# Altium PCB BD4Gv1.PcbDoc
Units mil, origin at the board's own origin, x right, y up, seen from the top; angles counter-clockwise.
Board outline 3562.99 x 3937.01 mil, 2 copper layers (Top Layer, Bottom Layer); 94 components, 79 nets, 401 pads, 136 vias.
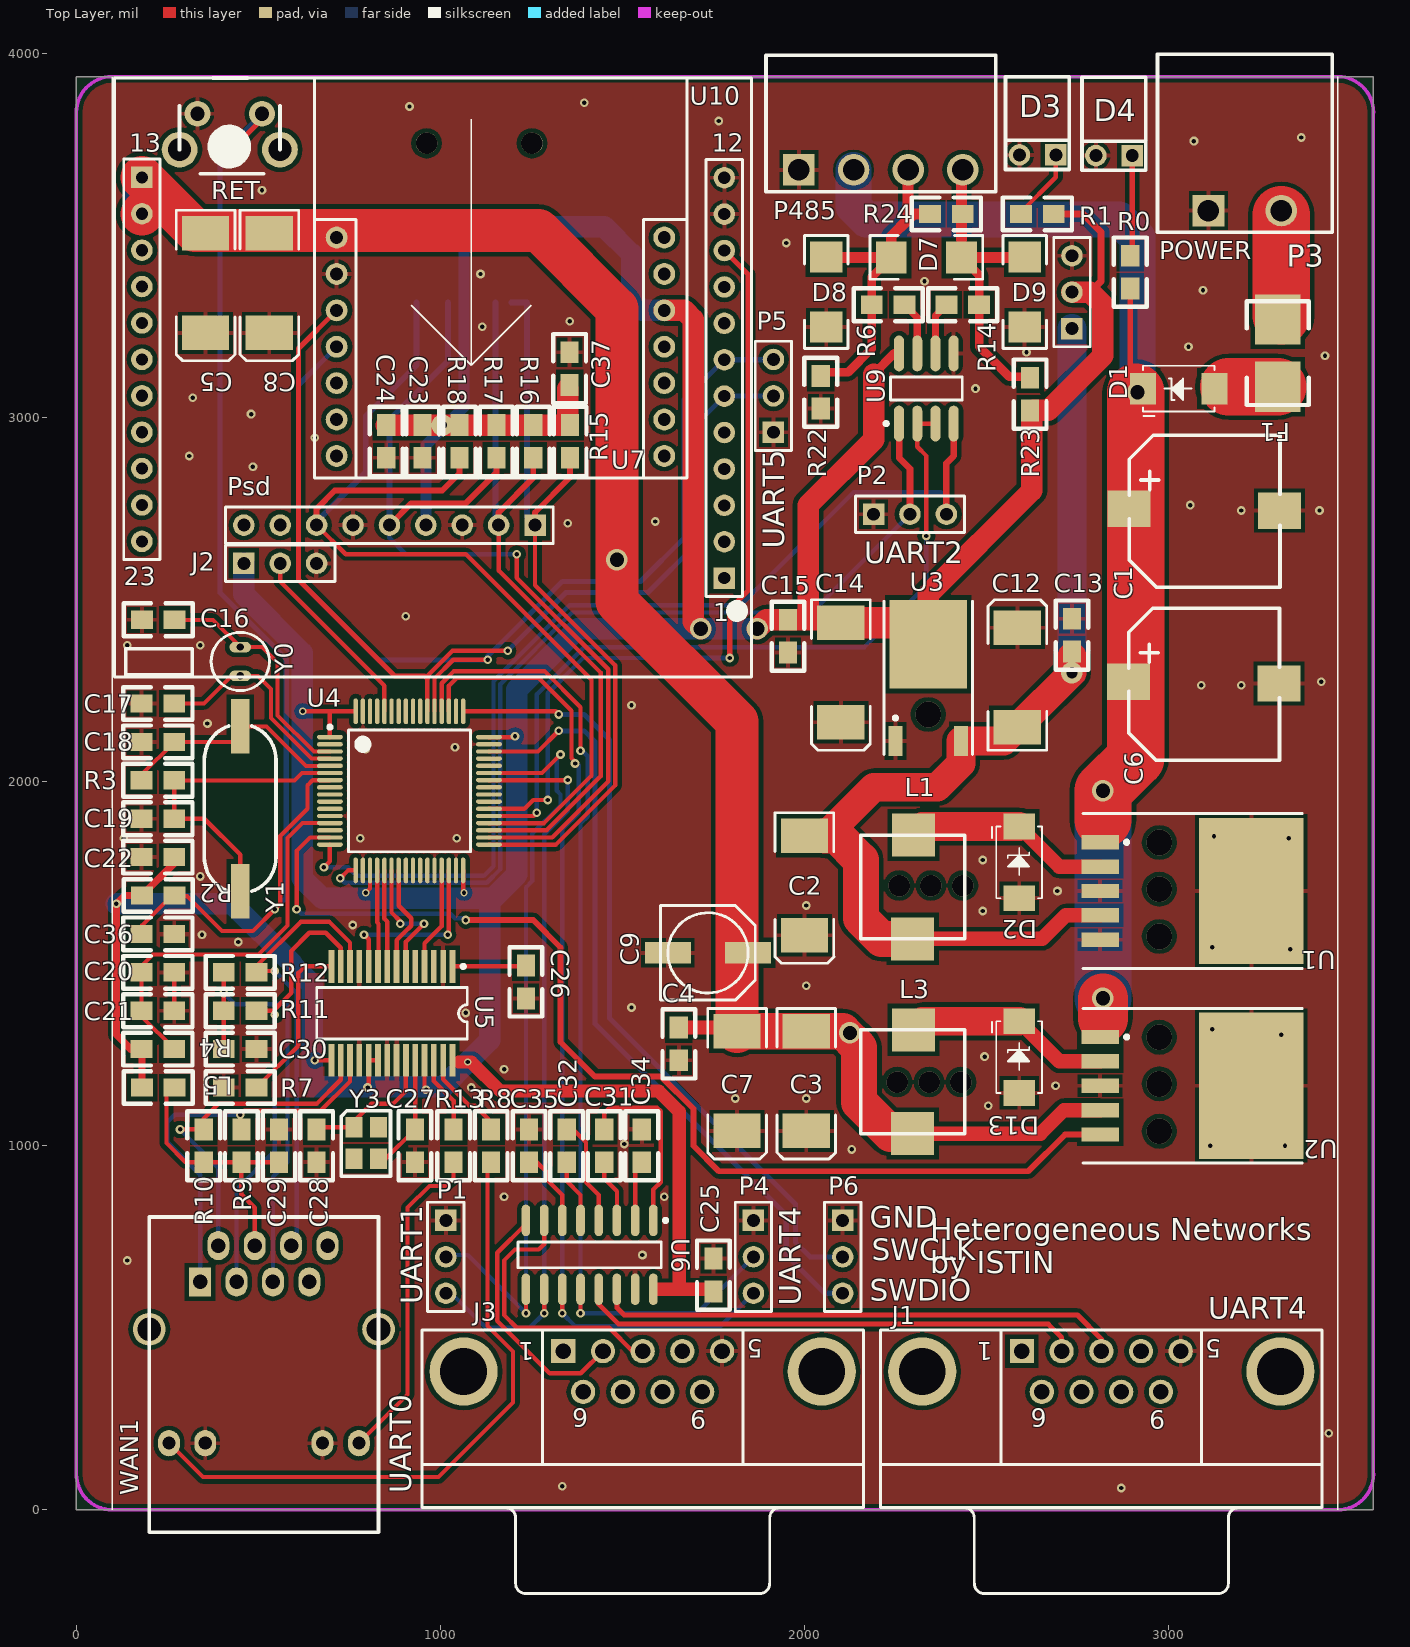
[diagram p0: Top Layer view]
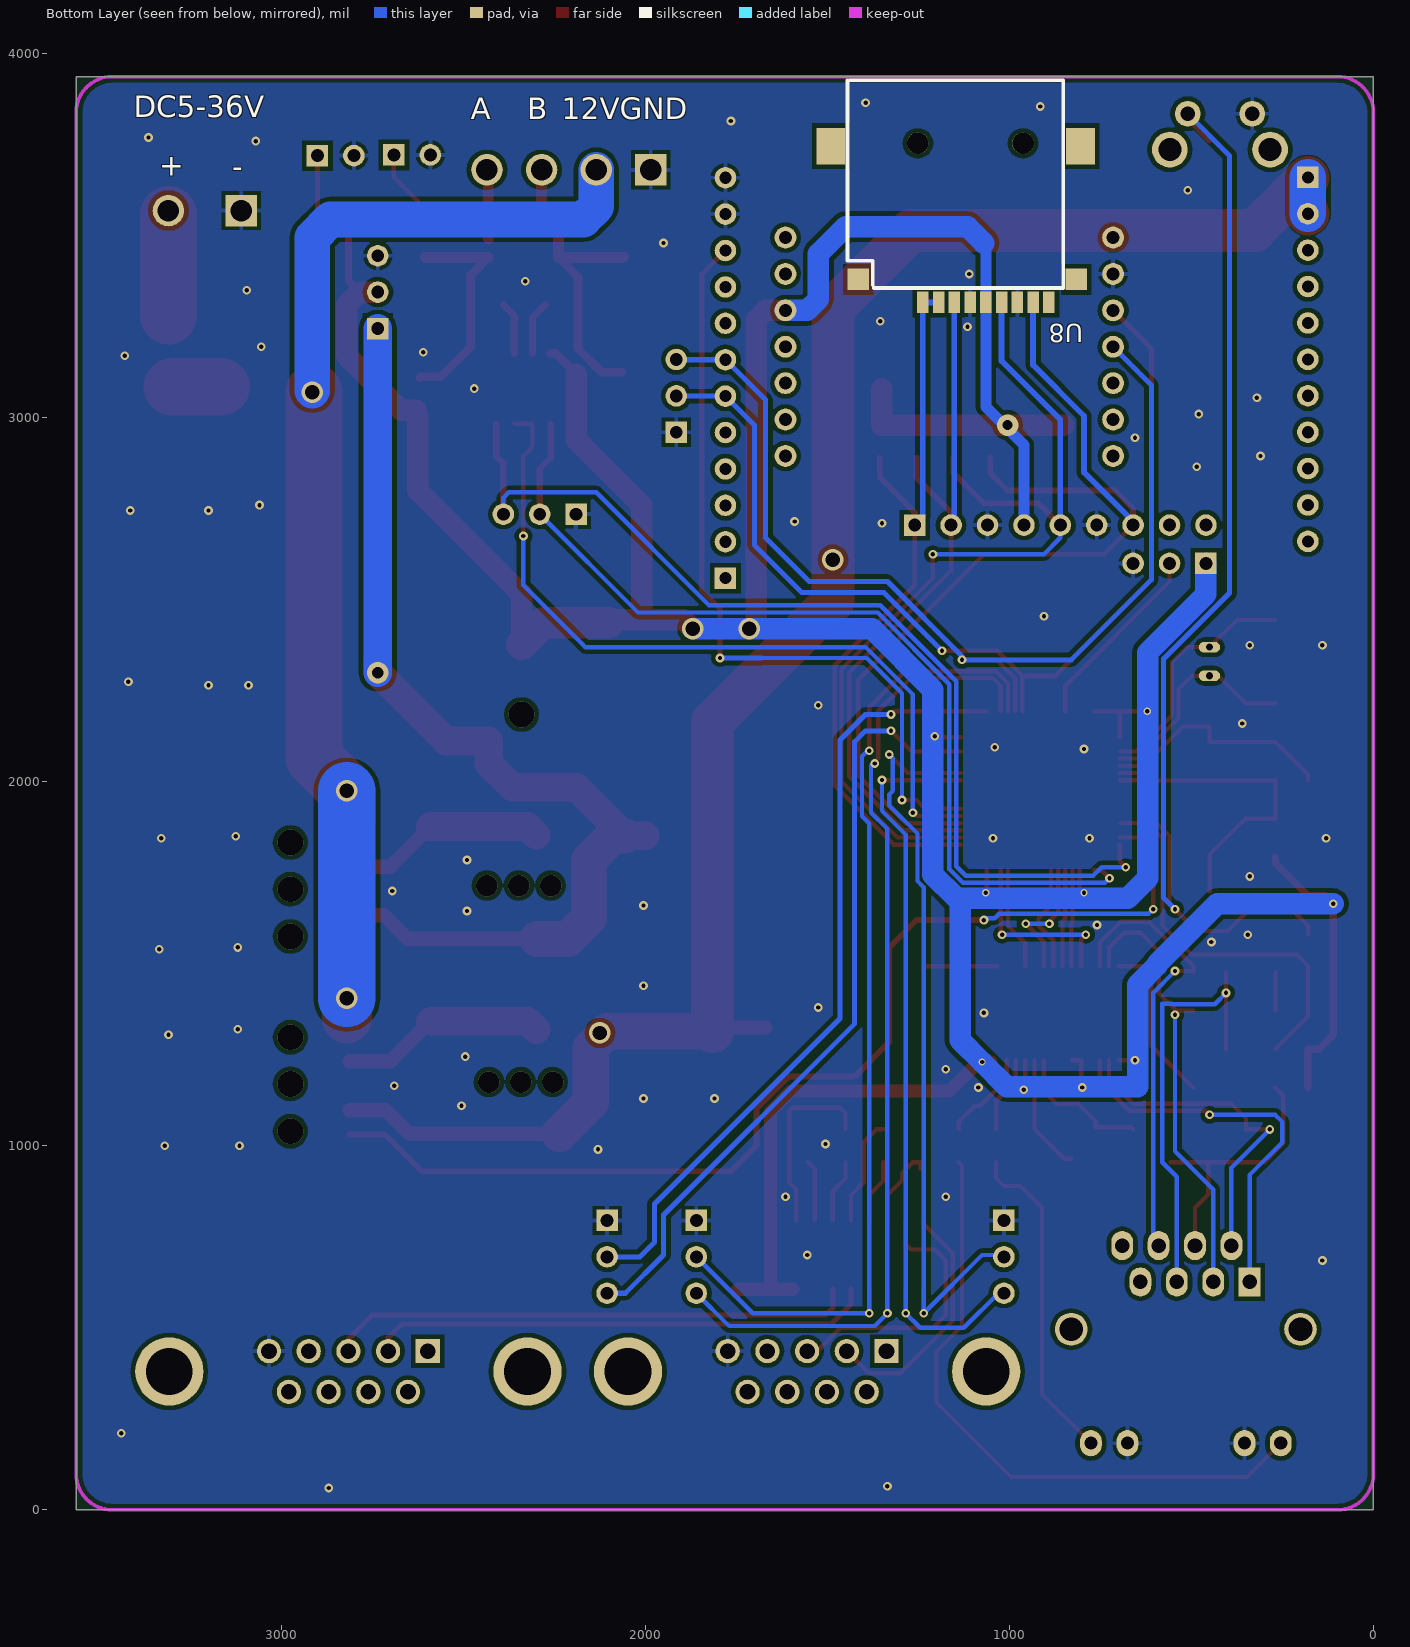
[diagram p1: Bottom Layer view, seen from below]

## Layer stack, top to bottom
Top Solder: solder mask 0.4, Solder Resist, Dk 3.5
Top Layer: signal copper 1.4
Dielectric1: dielectric 12.6, FR-4, Dk 4.8
Bottom Layer: signal copper 1.4
Bottom Solder: solder mask 0.4, Solder Resist, Dk 3.5

## Board outline
0,0 3562.99,0 3562.99,3937.01 0,3937.01

## Design rules (kind name [scope] priority, off if disabled: settings)
Clearance Clearance_1 [IsRegion] p1: gap=12
Clearance [All] p2: gap=7
ComponentClearance ComponentClearance_4 [InComponent('Y1')] p1: gap=0 collisioncheckmode=3 verticalgap=0 showdistances=FALSE
ComponentClearance ComponentClearance_3 [InComponent('C6')] p2: gap=0 collisioncheckmode=3 verticalgap=0 showdistances=FALSE
ComponentClearance ComponentClearance_2 [InComponent('Y0')] p3: gap=0 collisioncheckmode=3 verticalgap=0 showdistances=FALSE
ComponentClearance ComponentClearance_1 [InComponent('U7')] p4: gap=0 collisioncheckmode=3 verticalgap=0 showdistances=FALSE
ComponentClearance [All] p5: gap=0 collisioncheckmode=3 verticalgap=0 showdistances=FALSE
PolygonConnect via [IsVia] p1: connectstyle=Direct reliefconductorwidth=10 reliefentries=4 polygonreliefangle="90 Angle" airgapwidth=10
PolygonConnect PolygonConnect_1 [All] p2: connectstyle=Relief reliefconductorwidth=12 reliefentries=4 polygonreliefangle="90 Angle" airgapwidth=10
RoutingVias [All] p1: holewidth=12 width=24 viastyle="Through Hole" minholewidth=12 minwidth=24 maxholewidth=28 maxwidth=50
SolderMaskExpansion [All] p1: expansion=4
Width [All] p1: maxlimit=196.85 minlimit=10 preferedwidth=12 minimp=50.000000 maximp=50.000000 favimp=50.000000
29 further rules are at their usual default settings.

## Components (designator, comment, footprint, x,y, rotation, side; value= is the part's Value field where it differs from the comment)
C1 "470u/35V" C1007 2891.61,2755 r0 top
C2 "470u/10V" SMC 2000,1715 r270 top
C3 "470u/10V" SMC 2005,1177.79 r270 top
C4 "0.01uf" 0805 1655,1325 r270 top
C5 "470u/10V" SMC 355,3370 r270 top
C6 "470u/35V" C1007 2890,2280 r0 top
C7 "470u/10V" SMC 1815,1177.79 r270 top
C8 "470u/10V" SMC 530,3370 r270 top
C9 "470u/10V" CC6.56.5 1735,1530 r180 top
C12 "10uf" SMC 2585,2286.4 r90 top
C13 "0.01uf" 0805 2735,2357.92 r90 top
C14 "10uf" SMC 2100,2300.18 r270 top
C15 "0.01uf" 0805 1955,2445 r270 top
C16 "22pF" 0805 180,2445 r0 top
C17 "22pF" 0805 179.02,2215 r0 top
C18 "22pF" 0805 179.02,2109.5 r0 top
C19 "22pF" 0805 179.02,1898.5 r0 top
C20 "10uF" 0805 179.02,1476.5 r0 top
C21 "0.1uF" 0805 269.02,1371 r180 top
C22 "0.1uF" 0805 179.02,1793 r0 top
C23 "0.1uF" 0805 951.22,2890 r90 top
C24 "0.1uF" 0805 851.22,2980 r270 top
C25 "0.1uF" 0805 1750,600 r90 top
C26 "10uF" 0805 1235,1405 r90 top
C27 "18pF" 0805 930,1045 r270 top
C28 "18pF" 0805 660,1045 r270 top
C29 "10pF" 0805 556.67,1045 r270 top
C30 "10pF" 0805 495,1265.5 r180 top
C31 "0.1uF" 0805 1450,955 r90 top
C32 "0.1uF" 0805 1346.88,1045 r270 top
C34 "0.1uF" 0805 1553.12,955 r90 top
C35 "0.1uF" 0805 1243.75,955 r90 top
C36 "0.1uF" 0805 179.02,1582 r0 top
C37 "0.1uF" 0805 1355,3090 r90 top
D1 "B360A" B360A 3126.85,3080 r180 top
D2 "B360A" B360A 2590,1680.25 r90 top
D3 "LED" LED_SIDE 2640,3937.01 r270 top
D4 "LED" LED_SIDE 2850,3935 r270 top
D7 "P6SMBJ6.8CA" DO-2144AA 2335,3440.31 r180 top
D8 "P6SMBJ6.8CA" DO-2144AA 2060,3345.31 r90 top
D9 "P6SMBJ6.8CA" DO-2144AA 2605,3345.31 r90 top
D13 "B360A" B360A 2590,1145.25 r90 top
F1 "保险丝" 1812 3300,3270 r270 top
J1 "D Connector 9" DB9P 2597.52,435.91 r180 top
J2 "boot" HDR1X3 460,2600 r0 top
J3 "D Connector 9" DB9P 1337.52,435.91 r180 top
L1 "33uH" L0630 2155,1853.48 r270 top
L3 "33uH" L0630 2155,1318.48 r270 top
L5 "10uH" 0805 270,1160 r180 top
P1 "UART" HDR1X3 1015,795 r270 top
P2 "BD-TEST" HDR1X3 2190,2735 r0 top
P3 "" H2_5.08_side 2970,3999.06 r0 top
P4 "BD-TEST" HDR1X3 1860,795 r270 top
P5 "UART" HDR1X3 1915,2960 r90 top
P6 "STLINK" HDR1X3 2105,795 r270 top
P485 "RS485" H4_3.81 1985,3681.02 r0 top
POWER "UART" HDR1X3 2735,3245 r90 top
Psd "Header 9" HDR1X9 1260,2705 r180 top
R0 "2.2k" 0805 2895,3445 r270 top
R1 "1k" 0805 2595,3560 r0 top
R2 "1k" 0805 270,1687.5 r180 top
R3 "1M" 0805 179.02,2004 r0 top
R4 "1k" 0805 179.02,1265.5 r0 top
R6 "10" 0805 2275,3310.31 r180 top
R7 "2.7k" 0805 405,1160 r0 top
R8 "1k" 0805 1139.38,1045 r270 top
R9 "50" 0805 453.33,955 r90 top
R10 "50" 0805 350,955 r90 top
R11 "50" 0805 405,1371 r0 top
R12 "50" 0805 405,1476.5 r0 top
R13 "1k" 0805 1036.25,1045 r270 top
R14 "10" 0805 2390,3310.31 r0 top
R15 "47k" 0805 1356.22,2890 r90 top
R16 "47k" 0805 1254.97,2890 r90 top
R17 "47k" 0805 1153.72,2890 r90 top
R18 "47k" 0805 1052.47,2890 r90 top
R22 "47K" 0805 2045,3025 r90 top
R23 "47K" 0805 2620,3110 r270 top
R24 "120" 0805 2345,3560 r0 top
RET "KEY_M" KEY_90 510,3835 r180 top
U1 "LM2596S-5.0" 936A-02 3020,1700 r270 top
U2 "LM2596S-5.0" 936A-02 3020,1165 r270 top
U3 "AMS1084" TO-252 2340,2245 r0 top
U4 "STM32F103RCT6" LQFP64_N 915,1975 r0 top
U5 "EN28J60" SSOP28 1036.9,1492.94 r270 top
U6 "MAX3232ESE" NSO16_N 1410,700.51 r270 top
U7 "SIM800C" PCBComponent_1 653,2835 r0 top
U8 "sd card" MICRO-SD 852.01,3927.24 r0 bottom
U9 "MAX3485" NSO8_M 2335,3080.31 r90 top
U10 "WH-LTE-7S4" WH-LTE-7S4 950,3104.33 r0 top locked
WAN1 "HR911105A" HR911105A 340,625.94 r270 top
Y0 "32.768kHz" XTAL-B 450,2330 r270 top
Y1 "8MHz" 贴片晶振 450,1830 r90 top
Y3 "25MHz" 4P-Crystal 763.07,1051 r270 top

## Footprints (in the part's own frame and the unit in brackets; to place one, negate y for a bottom-side part, rotate by r counter-clockwise, add the part's x,y. Pads: shape width x height; smd on the part's side, far side on the other; paste and mask are expansions set on the pad)
4P-Crystal [mm]
  rect 1.4x1.2 smd: 1(0,0) 2(2.2,0) 3(2.2,1.7) 4(0,1.7)
  silkscreen extent -1.14,-0.89 3.43,2.54
0805 [mil]
  rect 60x50 smd: 1(0,0) 2(90,0)
  silkscreen extent -50,-45 140,45
936A-02 [mm] "D2-PAK; 5 Leads; Body 14.7 (inc. leads) x 10.2 mm (LxW max)"
  rect 1x2.6 smd: 1(-3.4,-5.275) 2(-1.7,-5.275) 3(0,-5.275) 4(1.7,-5.275) 5(3.4,-5.275)
  rect 10.2x7.3 smd: 6(0,5.275)
  silkscreen extent -5.4,-6.48 5.4,8.82
1812 [mm]
  rect 3.5x3.175 smd: 1(0,0) 2(4.699,0)
  silkscreen extent -1.27,-2.16 5.97,2.16
B360A [mm] "3.0A Surface Mount Schottky Barrier Rectifier_DIODES_XYB.lib(xiayubao)"
  rect 1.8x2.2 smd: 1(0,0) 2(5,0)
  silkscreen extent 0,-1.6 5,1.9
C1007 [mm]
  rect 3x2.54 smd: 1(0,-0.127) 2(10.5,-0.254)
  silkscreen extent 0.03,-5.6 10.54,5
CC6.56.5 [mm]
  rect 3.2x1.5 smd: 1(-2.794,0) 2(2.8,0)
  silkscreen extent -3.3,-3.3 3.3,3.3
DB9P [mm] "Connector; D Subminiature; 9 Position; Right Angle; Pitch 1.385 mm"
  rect 1.69x1.69 hole 1.09: 1(0,0)
  round 1.69 hole 1.09: 2(-2.77,0) 3(-5.54,0) 4(-8.31,0) 5(-11.08,0) 6(-1.385,2.84) 7(-4.155,2.84) 8(-6.925,2.84) 9(-9.695,2.84)
  round 4.76 hole 3.26: 10(6.955,1.42) 11(-18.035,1.42)
  silkscreen extent -20.94,-1.48 9.86,16.92
DO-2144AA [mm]
  rect 2.16x2.26 smd: 1(-2.45,0) 2(2.45,0)
  silkscreen extent -3.94,-1.52 3.94,1.52
H2_5.08_side [mm]
  rect 2.2x2.2 hole 1.5: 1(3.556,-10.922)
  round 2.2 hole 1.5: 2(8.636,-10.922)
  silkscreen extent 0,-12.42 12.19,-0.02
H4_3.81 [mm]
  rect 2.2x2.2 hole 1.5: 1(0,0)
  round 2.2 hole 1.5: 2(3.81,0) 3(7.62,0) 4(11.43,0)
  silkscreen extent -2.3,-1.52 13.73,8
HDR1X3 [mm] "Connector; Header; 3 Position"
  rect 1.5x1.5 hole 0.9: 1(0,0)
  round 1.5 hole 0.9: 2(2.54,0) 3(5.08,0)
  silkscreen extent -1.27,-1.27 6.35,1.27
HDR1X9 [mm] "Connector; Header; 9 Position"
  rect 1.5x1.5 hole 0.9: 1(0,0)
  round 1.5 hole 0.9: 2(2.54,0) 3(5.08,0) 4(7.62,0) 5(10.16,0) 6(12.7,0) 7(15.24,0) 8(17.78,0) 9(20.32,0)
  silkscreen extent -1.27,-1.27 21.59,1.27
HR911105A [mil]
  rect 80x60 hole 40: 1(0,0)
  oval 80x60 hole 40: 2(-100,50) 3(0,100) 4(-100,150) 5(0,200) 6(-100,250) 7(0,300) 8(-100,350)
  oval 72x60 hole 36: 9(442.91,-85.63) 10(442.91,14) 11(442.91,335.87) 12(442.91,436)
  round 90 hole 65: 13(129.92,490.16) 13(129.92,-139.76)
  silkscreen extent -179,-140 687,490
KEY_90 [mm]
  round 1.8 hole 1: 1(0,0) 2(4.5,0)
  round 2.5 hole 1.6: ""(-1.25,2.5) ""(5.75,2.5)
  silkscreen extent -1.25,-2.5 5.76,4.19
L0630 [mm]
  rect 3x3 smd: 1(0,3.683) 2(7.239,3.62)
  silkscreen extent 0,0 7.24,7.24
LED_SIDE [mm]
  rect 1.5x1.5 hole 0.9: 1(5.461,1.286)
  round 1.5 hole 0.9: 2(5.461,-1.254)
  silkscreen extent 0,-2.22 6.48,2.22
LQFP64_N [mm]
  oval 1.8x0.3 smd: 1(-5.55,3.75) 2(-5.55,3.25) 3(-5.55,2.75) 4(-5.55,2.25) 5(-5.55,1.75) 6(-5.55,1.25) 7(-5.55,0.75) 8(-5.55,0.25) 9(-5.55,-0.25) 10(-5.55,-0.75) 11(-5.55,-1.25) 12(-5.55,-1.75) 13(-5.55,-2.25) 14(-5.55,-2.75) 15(-5.55,-3.25) 16(-5.55,-3.75) 33(5.55,-3.75) 34(5.55,-3.25) 35(5.55,-2.75) 36(5.55,-2.25) 37(5.55,-1.75) 38(5.55,-1.25) 39(5.55,-0.75) 40(5.55,-0.25) 41(5.55,0.25) 42(5.55,0.75) 43(5.55,1.25) 44(5.55,1.75) 45(5.55,2.25) 46(5.55,2.75) 47(5.55,3.25) 48(5.55,3.75)
  oval 0.3x1.8 smd: 17(-3.75,-5.55) 18(-3.25,-5.55) 19(-2.75,-5.55) 20(-2.25,-5.55) 21(-1.75,-5.55) 22(-1.25,-5.55) 23(-0.75,-5.55) 24(-0.25,-5.55) 25(0.25,-5.55) 26(0.75,-5.55) 27(1.25,-5.55) 28(1.75,-5.55) 29(2.25,-5.55) 30(2.75,-5.55) 31(3.25,-5.55) 32(3.75,-5.55) 49(3.75,5.55) 50(3.25,5.55) 51(2.75,5.55) 52(2.25,5.55) 53(1.75,5.55) 54(1.25,5.55) 55(0.75,5.55) 56(0.25,5.55) 57(-0.25,5.55) 58(-0.75,5.55) 59(-1.25,5.55) 60(-1.75,5.55) 61(-2.25,5.55) 62(-2.75,5.55) 63(-3.25,5.55) 64(-3.75,5.55)
  silkscreen extent -5.67,-4.25 4.25,4.57
MICRO-SD [mm]
  round 1.5 hole 1.5: 0(2.8,4.4) 0(10.15,4.4)
  rect 0.8x1.5 smd: 1(8.7,15.5) 1(9.8,15.5) 2(7.6,15.5) 3(6.5,15.5) 4(5.4,15.5) 5(4.3,15.5) 6(3.2,15.5) 7(2.1,15.5) 8(1,15.5)
  rect 2x2.55 smd: 10(-1.2,4.6) 13(16.2,4.6)
  rect 1.5x1.5 smd: 11(-0.9,13.9) 12(14.3,13.9)
  silkscreen extent 0,0 15.05,14.5
NSO8_M [mm] "SOIC, 8-Leads, Body 4.9x3.9mm, Pitch 1.27mm, IPC Low Density"
  oval 2.5x0.7 smd: 1(-2.45,1.905) 2(-2.45,0.635) 3(-2.45,-0.635) 4(-2.45,-1.905) 5(2.45,-1.905) 6(2.45,-0.635) 7(2.45,0.635) 8(2.45,1.905)
  silkscreen extent -2.57,-2.5 0.8,2.93, body extent -2,-2.5 2,2.5, height 1.75
NSO16_N [mm] "SOIC, 16-Leads, Body 9.9x3.9mm, Pitch 1.27mm, IPC Medium Density"
  oval 2.2x0.6 smd: 1(-2.4,4.445) 2(-2.4,3.175) 3(-2.4,1.905) 4(-2.4,0.635) 5(-2.4,-0.635) 6(-2.4,-1.905) 7(-2.4,-3.175) 8(-2.4,-4.445) 9(2.4,-4.445) 10(2.4,-3.175) 11(2.4,-1.905) 12(2.4,-0.635) 13(2.4,0.635) 14(2.4,1.905) 15(2.4,3.175) 16(2.4,4.445)
  silkscreen extent -2.52,-5 0.9,5.42, body extent -2,-5 2,5, height 1.75
PCBComponent_1 [mil]
  round 60 hole 35.5: 1(62,660) 2(62,560) 3(62,460) 4(62,359.91) 5(62,260) 6(62,160) 7(62,60) 8(962,60) 9(962,160) 10(962,260) 11(962,360) 12(962,460) 13(962,560) 14(962,660)
  silkscreen extent 1,0 1024,1099
SMC [mm] "DO-214-AB/SMC; 2 C-Bend Leads; Body 7.9 x 5.9 mm, inc. leads (LxW)"
  rect 2.4x3.3 smd: 1(-3.475,0) 2(3.475,0)
  silkscreen extent -5.08,-2.05 5.42,2.06
SSOP28 [mil]
  rect 90x15.75 smd: 1(0.06,-3.66) 2(0.06,-29.25) 3(0.06,-54.84) 4(0.06,-80.43) 5(0.06,-106.02) 6(0.06,-131.61) 7(0.06,-157.2) 8(0.06,-182.8) 9(0.06,-208.39) 10(0.06,-233.98) 11(0.06,-259.57) 12(0.06,-285.16) 13(0.06,-310.75) 14(0.06,-336.34) 15(257.94,-336.34) 16(257.94,-310.75) 17(257.94,-285.16) 18(257.94,-259.57) 19(257.94,-233.98) 20(257.94,-208.39) 21(257.94,-182.8) 22(257.94,-157.2) 23(257.94,-131.61) 24(257.94,-106.02) 25(257.94,-80.43) 26(257.94,-54.84) 27(257.94,-29.25) 28(257.94,-3.66)
  silkscreen extent -5,-377 200,37
TO-252 [mm] "D-PAK/TO-252-AA; 3 Leads (1 Cropped); Body 10.1 (inc. leads) x 6.6 mm (LxW max)"
  rect 1x2.1 smd: 1(-2.285,-3.375) 3(2.285,-3.375)
  rect 5.4x6.2 smd: 2(0,3.375)
  silkscreen extent -3.09,-4.32 3.09,6.38
WH-LTE-7S4 [mm]
  rect 1.5x1.5 hole 0.85: 1(21.082,-13.843) 13(-19.558,14.122)
  round 1.5 hole 0.85: 2(21.082,-11.303) 3(21.082,-8.763) 4(21.082,-6.223) 5(21.082,-3.683) 6(21.082,-1.143) 7(21.082,1.397) 8(21.082,3.937) 9(21.082,6.477) 10(21.082,9.017) 11(21.082,11.557) 12(21.082,14.097) 14(-19.558,11.582) 15(-19.558,9.042) 16(-19.558,6.502) 17(-19.558,3.962) 18(-19.558,1.422) 19(-19.558,-1.118) 20(-19.558,-3.658) 21(-19.558,-6.198) 22(-19.558,-8.738) 23(-19.558,-11.278)
  silkscreen extent -21.46,-20.75 22.99,21.05
XTAL-B [mm]
  oval 0.75x1.5 hole 0.5: 1(-1.011,0.008) 2(0.989,0.008)
  silkscreen extent -2.04,-7.99 2.02,2.04
贴片晶振 [mil] "8M"
  rect 150x50 smd: 1(-130.32,0) 2(322.44,0)
  silkscreen extent -131,-98 323,98

## Part data
C1 C2 C3 C5 C6 C7 C8 C9: library part "Cap Pol3", "Polarized Capacitor (Surface Mount)"
C4 C13 C15: library part CAP, "Capacitor"
C12 C14: library part CAPACITOR, "Capacitor"
C16 C17 C18 C19 C20 C21 C22 C23 C24 C25 C27 C28 C29 C30 C31 C32 C34 C35 C36 C37: library part Cap, "Capacitor"
C26: library part Cap2, "Capacitor"
D1 D2 D13: library part Diode, "Default Diode"
D7 D8 D9: library part "D Schottky", "Schottky Diode"
F1: library part "Fuse 1", "Fuse"
J1 J3: "Receptacle Assembly, 9 Position, Right Angle"
J2 P1 P5 P6 POWER: library part "Header 3", "Header, 3-Pin"
L1 L3: library part Inductor, "Inductor,3A"
L5: library part Inductor, "Inductor"
P2 P4: library part MHDR1X3, "Header, 3-Pin"
P3: library part PWR
P485: library part "Header 4", "Header, 4-Pin"
Psd: "Header, 9-Pin"
R0 R1: library part RES2
R2 R3 R4 R6 R7 R8 R9 R10 R11 R12 R13 R14 R15 R16 R17 R18 R22 R23 R24: library part Res2, "Resistor"
U1 U2: "5V稳压芯片"
U3: library part AMS117
U4: library part STM32F103RDT6
U6: "3.0V TO 5.5V, Low-Power, up to 1Mbps, True RS-232 Transceiver Using Four 0.1礔 External Capacitor"
U7: library part Component_1
U9: library part MAX1487E
Y0 Y1 Y3: library part XTAL, "Crystal Oscillator"

## Via types
v1: diameter 24, hole 12, Top Layer to Bottom Layer, 110 vias
v2: diameter 59.06, hole 39.37, Top Layer to Bottom Layer, 7 vias
v3: diameter 70.87, hole 70.87, Top Layer to Bottom Layer, 7 vias
v4: diameter 59.06, hole 59.06, Top Layer to Bottom Layer, 6 vias
v5: diameter 20, hole 12, Top Layer to Bottom Layer, 4 vias
v6: diameter 59.06, hole 27.56, Top Layer to Bottom Layer, 1 vias
v7: diameter 59.06, hole 31.5, Top Layer to Bottom Layer, 1 vias

## Nets (pads, with @x,y where several pads share a name; then routed paths per layer and width w, separated by ;. In a path a pad name is that pad's centre, name@x,y a point inside that pad or via, vN(x,y) a via of type N, cw(c..) or ccw(c..) an arc to the next point about the centre after c; other vN are vias at no path point)
4GEN: U4.38 U10.10 | length 2171.7
  Top Layer w12: U4.38 1230.79,1925.79 1255,1950 v1(1295,1950)
  Top Layer w14: U10.10 1845,3394.33 1845,2525 1795,2475 v1(1795,2340)
  Bottom Layer w12: v1(1295,1950) 1295,2243.13 1391.87,2340 1680,2340
  Bottom Layer w14: 1680,2340 v1(1795,2340)
485EN: U4.37 U9.2 U9.3 | length 2158.7
  Top Layer w12: U4.37 1256.1,1906.1 v1(1265,1915) ; v1(2335,2675) 2335,2895 2310,2920 U9.2 U9.3
  Bottom Layer w12: v1(1265,1915) 1265,2240 1395,2370 2165,2370 2335,2540 v1(2335,2675)
A: R14.1 U9.6 | length 146
  Top Layer w19.68: U9.6 2360,3280.31 R14.1
B: R6.1 U9.7 | length 148
  Top Layer w19.68: R6.1 2310,3275.31 U9.7
BOOT0: J2.2 U4.60 | length 525
  Top Layer w12: J2.2 560,2550 846.1,2263.9 U4.60
C\S\: U4.20 U5.9 | length 265.7
  Top Layer w12: U4.20 826.42,1613.58 830,1610 830,1494.36 U5.9
D0: U2.5 U4.15 | length 3024.1
  Top Layer w12: v1(605,1650) 605,1810 642.05,1847.05 U4.15
  Top Layer w16: v1(1070,1620) 1255,1620 1330,1545 1330,1285 1425,1190 1606.67,1190 1695,1101.67 1695,1000 1765,930 2615,930 2716.14,1031.14 U2.5
  Bottom Layer w12: v1(605,1650) 617.53,1637.47 1027.53,1637.47 1040,1625 v1@1070,1625
GND: C1.2 C2.2 C3.2 C4.2 C5.2 C6.2 C7.2 C8.2 C9.2 C12.2 C13.2 C14.2 C15.2 C16.1 C17.1 C18.1 C19.1 C20.2 C21.1 C22.1 C23.1 C24.2 C25.2 C26.1 C27.2 C28.2 C29.1 C30.1 C34.2 C35.2 C36.2 C37.2 D2.1 D3.2 D4.2 D8.1 D9.1 D13.1 J1.5 J2.3 J3.5 P1.1 P2.1 P3.1 P4.1 P5.1 P6.1 P485.1 POWER.3 Psd.3 Psd.6 R7.1 R22.1 RET.2 U1.3 U1.5 U1.6 U2.3 U2.6 U3.1 U4.12 U4.18 U4.28 U4.31 U4.47 U4.63 U5.2 U5.11 U5.18 U5.21 U5.22 U6.15 U7.2 U8.3 U8.6 U9.5 U10.11 U10.12 WAN1.10 WAN1.11 | length 105.5
  Top Layer w12: C21.1 C20.2
  other v1: 2870,60 1335,65 3440,210 140,685 1555,700 1175,860 1615,860 2130,990 3115,1000 3320,1000 1505,1005 2505,1110 1810,1130 2005,1130 1085,1160 2690,1165 1175,1210 2495,1245 3310,1305 3120,1320 1070,1365 1525,1380 2005,1440 3335,1540 3120,1545 445,1560 345,1580 759.4,1606.56 2490,1645 2005,1660 2695,1700 340,1740 2490,1785 130,1845 780,1845 1045,1845 3330,1845 3125,1850 795,2090 1040,2095 360,2160 1525,2210 3090,2265 3200,2265 3420,2275 140,2375 340,2375 905,2455 1350,2710 1590,2715 3200,2745 3415,2745 3060,2760 485,2865 310,2895 655,2945 480,3010 320,3055 2470,3080 3430,3170 2610,3180 3055,3195 1115,3250 1355,3265 3095,3350 2330,3375 1110,3395 1950,3480 510,3625 3070,3760 3365,3770 1765,3815 915,3855 1395,3865
I\N\T\: U4.29 U5.4 | length 283.1
  Top Layer w12: U5.4 956.46,1556.46 1003.58,1603.58 U4.29
LEDA: R8.1 U5.27 | length 253.4
  Top Layer w12: U5.27 1007.65,1182.35 1080,1110 1095,1110 1139.38,1065.62 R8.1
LEDB: R13.1 U5.26 | length 212.4
  Top Layer w12: U5.26 982.06,1177.94 1036.25,1123.75 R13.1
MISO: U4.22 U5.6 | length 373.2
  Top Layer w12: U4.22 865.79,1641.08 890,1616.87 v1(890,1610) ; U5.6 905.28,1560.28 v1(955,1610)
  Bottom Layer w12: v1(955,1610) v1(890,1610) ; v1(890,1610) 885,1610 888.43,1613.44 890,1611.87 v1(890,1610)
MOSI: U4.23 U5.7 | length 294.8
  Top Layer w12: U5.7 879.69,1564.69 900,1585 900.36,1585 920,1604.64 920,1625 885.47,1659.53 U4.23
NetC16_2: C16.2 U4.3 Y0.1 | length 661
  Top Layer w11: C16.2 375.13,2445 Y0.1 510.19,2369.81 553,2327 553,2182.46 652.19,2083.27 U4.3
NetC17_2: C17.2 U4.4 Y0.2 | length 600.1
  Top Layer w11: C17.2 350,2215 426.07,2291.07 Y0.2 498.93,2291.07 535,2255 535,2175 646.42,2063.58 U4.4
NetC18_2: C18.2 R3.1 U4.5 Y1.2 | length 657.9
  Top Layer w11: R3.1 179.02,2019.5 C18.2 449.5,2109.5 450,2110 Y1.2 522.56,2152.44 631.1,2043.9 U4.5
NetC19_2: C19.2 R3.2 U4.6 Y1.1 | length 863.5
  Top Layer w11: R3.2 599,2004 619.21,2024.21 U4.6
  Top Layer w12: R3.2 C19.2 351.5,1898.5 450,1800 Y1.1
NetC20_1: C20.1 C21.2 R4.2 U4.13 | length 1086.4
  Top Layer w11: R4.2 179.02,1355.5 C21.2 C20.1 179.02,1494.02 210,1525 500,1525 580,1605 580,1845 621.42,1886.42 U4.13
NetC26_2: C26.2 U5.1 | length 202.6
  Top Layer w12: U5.1 1232.87,1492.87 C26.2
NetC27_1: C27.1 U5.24 Y3.3 | length 323.8
  Top Layer w12: Y3.3 849.39,964.39 C27.1 930.87,1045.87 U5.24
NetC28_1: C28.1 U5.23 Y3.1 | length 383.6
  Top Layer w12: C28.1 666,1051 Y3.1 763.07,1068.07 810,1115 870,1115 905.28,1150.28 U5.23
NetC29_2: C29.2 L5.1 R9.1 R10.1 WAN1.4 | length 737
  Top Layer w12: L5.1 247.5,1137.5 247.5,1007.5 300,955 R10.1 R9.1 ; WAN1.4 490,830 453.33,866.67 R9.1 ; C29.2 R9.1
NetC30_2: C30.2 R11.1 R12.1 WAN1.5 | length 1179.9
  Top Layer w12: C30.2 R11.1 v1(405,1420) R12.1
  Bottom Layer w12: v1(405,1420) 436.06,1388.94 551,1388.94 552.06,1390 580,1390 580,955 540,915 WAN1.5
NetC31_1: C31.1 U6.3 | length 174.5
  Top Layer w12: C31.1 1450,910 1485,875 U6.3
NetC31_2: C31.2 U6.1 | length 518.6
  Top Layer w12: C31.2 1450,1090 1465,1105 1595,1105 1605,1095 1605,900 1585,880 U6.1
NetC32_1: C32.1 U6.4 | length 297.1
  Top Layer w12: C32.1 1365,1045 1400,1010 1400,900 1435,865 U6.4
NetC32_2: C32.2 U6.5 | length 175.8
  Top Layer w12: C32.2 1346.88,903.12 1385,865 U6.5
NetC34_1: C34.1 U6.2 | length 167.5
  Top Layer w12: U6.2 1535,936.88 C34.1
NetC35_1: C35.1 U6.6 | length 229
  Top Layer w12: C35.1@1243.75,936.25 C35.1 1265,955 1295,925 1295,905 1335,865 U6.6
NetD1_1: D1.1 F1.2 | length 135
  Top Layer w157.48: 3165,3085 F1.2
NetD2_2: D2.2 L1.1 U1.2 | length 567.7
  Top Layer w39.37: D2.2 2700.17,1766.93 U1.2
  Top Layer w78.74: L1.1 2323.62,1877.1 D2.2
NetD3_1: D3.1 R1.1 | length 201.6
  Top Layer w12: R1.1 2595,3565 2690.65,3660.65 D3.1
NetD4_1: D4.1 R0.1 | length 277.3
  Top Layer w14: R0.1 2900.65,3450.65 D4.1
NetD13_2: D13.2 L3.1 U2.2 | length 567.7
  Top Layer w39.37: D13.2 2700.17,1231.93 U2.2
  Top Layer w78.74: L3.1 2323.62,1342.1 D13.2
NetF1_1: F1.1 P3.2 | length 277.2
  Top Layer w157.48: F1.1@3310,3280 P3.2@3310,3557.24
NetR7_2: R7.2 U5.14 | length 460.6
  Top Layer w12: R7.2 610,1275 610,1475 627.87,1492.87 U5.14
NetR8_2: R8.2 WAN1.9 | length 1770.6
  Top Layer w11: WAN1.9@263.03,183.03 WAN1.9 347.4,90 995,90 1200,295 1200,435 1130,505 1130,945.62 R8.2
NetR13_2: R13.2 WAN1.12 | length 906.1
  Top Layer w11: WAN1.12 910,317.03 910,830 970,890 1015,890 1036.25,911.25 R13.2
PB0: U4.26
PB1: U4.27
PC0: U4.8
PC1: U4.9
PC2: U4.10
PC3: U4.11
PC4: U4.24
PC5: U4.25
PC13: U4.2
REST: U4.30 U5.10 | length 504.5
  Top Layer w12: v1@790,1584.16 v1(790,1580) 802.92,1567.08 U5.10 ; v1(1020,1580) 1023.27,1583.27 U4.30
  Bottom Layer w12: v1(790,1580) v1(1020,1580)
RET: C36.1 R2.1 RET.1 U4.7 | length 3352.7
  Top Layer w12: C36.1@179.02,1580.5 C36.1 179.02,1604.02 260,1685 305,1685 400,1590 485,1590 v1(545,1650) 560,1665 560,1851.16 635,1926.16 635,1990 649.53,2004.53 U4.7
  Top Layer w14: 450,3760 510,3820 RET.1
  Bottom Layer w14: RET.1 395,3720 395,2518.44 576.47,2336.97 576.47,1681.47 v1(545,1650)
RS485_A: D7.1 D9.2 P485.4 R14.2 R23.1 R24.2 | length 807
  Top Layer w24: D7.1 2480,3391.77 R14.2 2480,3195 2562.5,3112.5 2617.5,3112.5 R23.1
  Top Layer w30: D7.1 2603.54,3440.31 D9.2 ; 2431.46,3490.31 2431.46,3677.48 P485.4
RS485_B: D7.2 D8.2 P485.3 R6.2 R22.2 R24.1 | length 924.9
  Top Layer w24: R22.2@2065,3125.31 2119.69,3125.31 2120,3125 2185,3190 R6.2 2185,3386.77 D7.2
  Top Layer w30: D8.2 2061.46,3440.31 D7.2 2238.54,3498.54 2285,3545 ; P485.3 2285,3545 ; R24.1 2300,3560 2285,3545
RX1: P1.2 U4.43 U6.9 | length 2142.5
  Top Layer w12: U4.43 1279.21,2024.21 v1(1330,2075) ; v1(1235,540) U6.9
  Bottom Layer w12: P1.2@1025,700 1075,700 v1(1235,540) 1235,1709.86 1252.53,1727.38 1252.53,1857.53 1330,1935 1330,1965 1320,1975 1320,2065 v1(1330,2075)
RX1_O: J3.2 U6.8 | length 684.2
  Top Layer w12: U6.8 1235,785 1156,706 1156,519 1300,375 1385.67,375 J3.2
RX2: P2.2 U4.17 U9.1 | length 2599.7
  Top Layer w12: v1(725,1735) 746.5,1756.5 U4.17
  Top Layer w18: U9.1 2260,2890 2290,2860 P2.2
  Bottom Layer w12: v1(725,1735) 737.47,1722.53 1127.38,1722.53 1164.86,1760 1164.86,2267.99 1361.87,2465 2020,2465 P2.2
RX4: P4.2 U4.52 U6.12 | length 2803
  Top Layer w12: U4.52 1003.58,2270.45 1037.13,2304 1286,2304 1385,2205 v1(1385,2085) ; v1(1385,540) U6.12
  Bottom Layer w12: v1(1385,2085) 1390,2085 1405,2070 1405,1905 1385,1885 v1(1385,540) 1705,540 P4.2
RX4_O: J1.2 U6.13 | length 1388
  Top Layer w14: U6.13 1435,565 1490,510 2670,510 2706.57,473.43 J1.2
RX5: P5.2 U4.54 U7.3 U10.6 | length 2810.4
  Top Layer w12: U4.54 964.21,2291.08 1033.13,2360 v1(1185,2360)
  Top Layer w14: U7.3 610,3190 610,2555 873.92,2291.08 956.71,2291.08 963.9,2283.9 ; P5.2@1914.33,3059.33 P5.2
  Bottom Layer w14: v1(1185,2360) 1345,2520 1570,2520 1700,2650 1700,2979.33 U10.6 1914.33,3059.33 P5.2
SCK: U4.21 U5.8 | length 266.9
  Top Layer w12: U4.21 846.1,1623.9 854.1,1615.9 U5.8
SD_CS: Psd.1 R15.1 U4.33 U8.1 | length 2078
  Top Layer w12: U4.33 1317.36,1827.36 1480,1990 1480,2320 1260,2540 Psd.1
  Top Layer w16: Psd.1 1260,2740 1356.22,2836.22 R15.1
  Bottom Layer w16: U8.1@1194.53,3317.01 1237.83,3317.01 Psd.1@1237.83,2727.17
SPI_MISO: Psd.7 R18.1 U4.36 U8.7 | length 2775.9
  Top Layer w12: Psd.7 740,2625 1070,2625 1415,2280 1415,2016.87 1284.55,1886.42 U4.36
  Top Layer w16: Psd.7 660,2750 710,2800 1005,2800 1052.47,2847.47 R18.1
  Bottom Layer w16: Psd.7 660,2715 795,2850 795,3005 934.69,3144.69 U8.7
SPI_MOSI: Psd.2 R16.1 U4.35 U8.2 | length 2001.5
  Top Layer w12: U4.35 1291.73,1866.73 1440,2015 1440,2300 1160,2580 Psd.2
  Top Layer w16: Psd.2 1160,2740 1254.97,2834.97 R16.1
  Bottom Layer w16: Psd.2@1151.22,2713.78 U8.2
SPI_SCK: Psd.5 R17.1 U4.34 U8.5 | length 2596.2
  Top Layer w12: U4.34 1307.05,1847.05 1461,2001 1461,2309 1210,2560 v1(1210,2625)
  Top Layer w16: Psd.5 920,2765 1070,2765 1153.72,2848.72 R17.1
  Bottom Layer w12: Psd.5 860,2670 905,2625 v1(1210,2625)
  Bottom Layer w16: Psd.5 860,2995 1021.3,3156.3 U8.5
SWCLK: P6.2 U4.49 | length 2172.7
  Top Layer w12: U4.49 1316.5,2193.5 v1(1325,2185)
  Bottom Layer w14: v1(1325,2185) 1395,2185 1465,2115 1465,1350 1975,840 1975,735 2015,695 P6.2
SWDIO: P6.3 U4.46 | length 2153.4
  Top Layer w12: U4.46 1268.27,2083.27 v1(1325,2140)
  Bottom Layer w14: v1(1325,2140) 1395,2140 1425,2110 1425,1335 1950,810 1950,700 2055,595 P6.3
TPIN+: R11.2 U5.13 WAN1.3 | length 1247.7
  Top Layer w12: R11.2 541,1371 v1@545,1367 ; v1(545,1360) v1@545,1367 ; U5.13 726.15,1543.85 685,1585 640,1585 590,1535 590,1420 545,1375 v1@545,1367
  Bottom Layer w12: WAN1.3 440,880 545,985 v1(545,1360)
TPIN-: R12.2 U5.12 WAN1.6 | length 1249.7
  Top Layer w12: v1(545,1480) 498.5,1480 R12.2 495,1493.84 616.16,1615 695,1615 751.74,1558.26 U5.12
  Bottom Layer w12: v1(545,1480) 605,1420 605,740.94 WAN1.6
TPOUT+: R9.2 U5.17 WAN1.1 | length 1082.6
  Top Layer w12: v1(450,1085) 461,1096 671,1096 751.74,1176.74 U5.17
  Bottom Layer w12: WAN1.1 340,920 250,1010 250,1065 270,1085 v1(450,1085)
TPOUT-: R10.2 U5.16 WAN1.2 | length 931.5
  Top Layer w12: v1(285,1045) R10.2 350,1075 390,1115 660,1115 726.15,1181.15 U5.16
  Bottom Layer w12: v1(285,1045) 390,940 WAN1.2
TX1: P1.3 U4.42 U6.10 | length 2092.6
  Top Layer w12: U4.42 1349.53,2004.53 v1(1350,2005) ; v1(1285,540) U6.10
  Bottom Layer w12: P1.3@1025,600 1125,500 1245,500 v1(1285,540) 1285,1855 1350,1920 v1(1350,2005)
TX1_O: J3.3 U6.7 | length 737.8
  Top Layer w12: U6.7 1285,730 1270,715 1205,715 1175,685 1175,535 1210,500 1463.98,500 J3.3@1528.07,435.91
TX2: P2.3 U4.16 U9.4 | length 2831.2
  Top Layer w12: v1(680,1765) 696.5,1781.5 U4.16
  Top Layer w18: P2.3 2390,2875 2410,2895 U9.4
  Bottom Layer w12: v1(680,1765) 746.53,1765 770,1741.53 1119.51,1741.53 1145.86,1767.87 1145.86,2275.86 1355,2485 1825,2485 2135,2795 2375,2795 2390,2780 P2.3
TX4: P4.3 U4.51 U6.11 | length 2780.4
  Top Layer w12: U4.51 1023.27,2263.27 1045,2285 1270,2285 1360,2195 1360,2065 1370,2055 v1(1370,2050) ; v1(1335,540) U6.11
  Bottom Layer w12: v1(1370,2050) 1375,2050 1380,2045 1380,1915 1335,1870 v1(1335,540) 1370,505 1770,505 P4.3
TX4_O: J1.3 U6.14 | length 1450.6
  Top Layer w14: U6.14 1485,555 1505,535 2750,535 2815.63,469.37 J1.3
TX5: P5.3 U4.53 U7.4 U10.7 | length 2927.3
  Top Layer w12: U4.53 983.9,2283.9 1035,2335 v1(1130,2335) ; U10.7@1760.67,3159.33 U10.7 ; P5.3@1914.33,3159.33 P5.3
  Bottom Layer w14: U7.4 610,3089.91 610,2555 830,2335 v1(1130,2335) 1130,2345 1335,2550 1550,2550 1670,2670 1670,3049.33 U10.7 1914.33,3159.33 P5.3
V_3.3V: C14.1 C15.1 C22.2 C23.2 C24.1 C25.1 C37.1 J2.1 L5.2 POWER.2 Psd.4 R1.2 R2.2 R4.1 R15.2 R16.2 R17.2 R18.2 R23.2 U3.2 U4.1 U4.19 U4.32 U4.48 U4.64 U5.15 U5.19 U5.20 U5.25 U5.28 U6.16 U7.12 U8.4 U9.8 | length 13388.2
  Top Layer w12: v5(621.5,2193.5) 698.5,2193.5 ; v1(655,1235) U5.15 ; U4.1 696.5,2191.5 698.5,2193.5 ; U4.64 698.5,2193.5 ; v5(795,1695) 806.73,1706.73 U4.19 ; v1(800,1160) 802.92,1162.92 U5.19 U5.20 ; U5.25 956.46,1158.54 v1(960.73,1154.27) ; U4.32 1062.64,1697.36 v5(1065,1695) ; U4.48 1202.64,2122.64 v1(1205,2125) v1@1205,2127.01
  Top Layer w19.68: R1.2 2765,3560 2815,3510 2815,3375 2785,3345
  Top Layer w20: L5.2 180,1264.52 R4.1 149.5,1265.5 110,1305 v1(110,1665) 132.5,1687.5 R2.2 269.02,1776.52 C22.2
  Top Layer w24: 2190,3120 2246.77,3176.77 U9.8
  Top Layer w36: 1050,1230 v5(1075,1230) 1085,1230 1165,1150 1600,1150 1656.25,1093.75 1656.25,606.02 ; U6.16@1595,606.02 1656.25,606.02 ; C25.1 1743.98,606.02 1656.25,606.02
  Top Layer w59.06: C24.1 C23.2 v6(1005,2980) R18.2 R17.2 R16.2 1350,2980 C37.1@1350,3080 ; U7.12 1670,3295 1695,3270 1695,2440 v2(1715,2420) ; v2(1870,2420) 1895,2445 C15.1 2010,2445 ; C14.1 2091.99,2445 2010,2445 ; 2190,3120 2190,2940 2010,2760 2010,2445 ; U3.2 2340,2515 2625,2800 R23.2@2625,3005 ; R23.2@2630,3020 2670,3020 2820,3170 2820,3310 2785,3345 POWER.2
  Top Layer w86.61: C14.1 2280.88,2436.99 U3.2
  Bottom Layer w30: Psd.4 960,2925 1064.61,3029.61 U8.4 1064.61,3474.61 1070,3480
  Bottom Layer w59.06: v1(110,1665) 428.63,1665 593.53,1500.1 593.53,1496.47 647.53,1442.47 647.53,1162.47 1007.47,1162.47 v5(1075,1230) 1135,1290 1135,1670 ; J2.1 460,2515 620,2355 620,1735 675,1680 1065,1680 1145,1680 1210,1745 1210,2252.99 1377.01,2420 v2(1715,2420) v2(1870,2420) ; 1070,3480 1115,3525 1450,3525 1525,3450 1525,3325 1555,3295 U7.12
V_5V: C2.1 C12.1 C13.1 L1.2 POWER.1 U1.4 U3.3 | length 2941.1
  Top Layer w39.37: L1.2 2653.48,1568.48 2718.07,1633.07 U1.4
  Top Layer w78.74: C2.1 2056.81,1851.81 2190,1985 2365,1985 2429.96,2049.96 U3.3 2547.54,2112.13 C12.1 v7(2735,2299.59) C13.1@2735,2345
  Top Layer w98.43: C2.1@2056.81,1851.81 2088.19,1851.81 2155,1785 2155,1625 2211.52,1568.48 L1.2
  Bottom Layer w78.74: v7(2735,2299.59) POWER.1
V_12V: C1.1 C6.1 D1.2 P485.2 R0.2 U1.1 U2.1 | length 3463
  Top Layer w14: R0.2 2895,3115 D1.2
  Top Layer w137.8: 2820,1350 v2(2820,1405)
  Top Layer w157.48: 2820,1895 v2(2820,1975) 2910,2065 D1.2@2910,3070
  Bottom Layer w98.43: P485.2 2135,3580 2170,3545 2865,3545 2915,3495 v2@2915,3075
  Bottom Layer w157.48: v2(2820,1405) v2(2820,1975)
  other v2: 2915,3070
V_SIM: C3.1 C4.1 C5.1 C7.1 C8.1 C9.1 L3.2 U2.4 U7.1 U10.13 U10.14 | length 5124.9
  Top Layer w39.37: C4.1@1670,1325 1804.61,1325 C7.1 ; 2236.52,1033.48 L3.2 2648.48,1033.48 2713.07,1098.07 U2.4
  Top Layer w100: C7.1 C3.1 2105.39,1314.61 2150,1270 2150,1120 2236.52,1033.48
  Top Layer w118.11: U10.14 229.67,3610 230.33,3610 ; U10.13 230.33,3610 ; C7.1 1815,2165 1485,2495 v2(1485,2610) 1485,3300 1270,3515 530,3515 325.33,3515 230.33,3610
  Bottom Layer w100: U10.14 U10.13
  other v2: 2125,1310
WKUP: U4.14
pads on no net: J1.1 J1.4 J1.6 J1.7 J1.8 J1.9 J1.10 J1.11 J3.1 J3.4 J3.6 J3.7 J3.8 J3.9 J3.10 J3.11 Psd.8 Psd.9 RET. U4.39 U4.40 U4.41 U4.44 U4.45 U4.50 U4.55 U4.56 U4.57 U4.58 U4.59 U4.61 U4.62 U5.3 U5.5 U7.5 U7.6 U7.7 U7.8 U7.9 U7.10 U7.11 U7.13 U7.14 U8.0 U8.8 U8.10 U8.11 U8.12 U8.13 U10.1 U10.2 U10.3 U10.4 U10.5 U10.8 U10.9 U10.15 U10.16 U10.17 U10.18 U10.19 U10.20 U10.21 U10.22 U10.23 WAN1.7 WAN1.8 WAN1.13 Y3.2 Y3.4
copper on no net:
  other v3: 2975,1040 2975,1170 2975,1298.11 2975,1575 2975,1705 2975,1833.11 2340,2185
  other v4: 2255,1175 2342.5,1175 2430,1175 2260,1715 2347.5,1715 2435,1715

## Polygon pours and split planes (outlines as drawn)
GND on Top Layer "Top Layer-No Net 1" (solid, remove dead copper, pour order 3): 0,0 3565,0 3565,3940 5,3940 0,3935
GND on Bottom Layer "Top Layer-No Net 1" (solid, remove dead copper, pour order 5): 0,0 3565,0 3565,3940 0,3940

## Keep-outs
Keep-Out Layer:
  lines w10: 3465,0 ccw(c3465,98.43) 3563.43,98.43 ; 3470,0 98.43,0 cw(c98.43,98.43) 0,98.43 0,3838.58 cw(c98.43,3838.58) 98.43,3937.01 3465,3937.01 cw(c3465,3838.58) 3563.43,3838.58 ; 3562.99,92.99 3562.99,3839.02

## Silkscreen, mask and mechanical layers (free items; w line width, h text height)
Top Overlay:
  lines w3.94: 98.43,0 98.43,3935 ; 3464.57,0 3464.57,3937.01
  text "UART5" at 1945,2640 h59.06 r90
  text "UART2" at 2165,2600 h59.06
  text "GND" at 2180,775 h59.06
  text "SWCLK" at 2185,685 h59.06
  text "Heterogeneous Networks / by ISTIN" at 2345,650 h60
  text "SWDIO" at 2180,575 h59.06
  text "UART1" at 950,565 h59.06 r90
  text "UART4" at 1990,560 h59.06 r90
  text "UART4" at 3110,525 h59.06
  text "UART0" at 920,45 h59.06 r90
Bottom Overlay:
  text "DC5-36V" at 3405,3825 h59.06
  text "GND" at 2070,3820 h59.06
  text "12V" at 2230,3820 h59.06
  text "B" at 2325,3820 h59.06
  text "A" at 2480,3820 h59.06
  text "+" at 3335,3665 h59.06
  text "-" at 3135,3660 h59.06
Top Paste:
  lines w12: 1495,1820 1570,1745 1735,1745 1735,2115 1675,2175 1495,2175 1495,1820
  text "V0" at 1735,2165 h30 r90
  text "ISTIN" at 1680,1780 h200 r90

## Text inside footprints (layer, text, board x,y; h text height)
J1: Top Overlay "5" at 3145.71,467.48 h50 r180; Top Overlay "1" at 2517.52,460.91 h50 r180; Top Overlay "9" at 2990.71,272.48 h50 r180; Top Overlay "6" at 2665.71,277.48 h50 r180
J3: Top Overlay "5" at 1885.71,467.48 h50 r180; Top Overlay "1" at 1257.52,460.91 h50 r180; Top Overlay "9" at 1730.71,272.48 h50 r180; Top Overlay "6" at 1405.71,277.48 h50 r180
U10: Top Overlay "23" at 130,2540.33 h50; Top Overlay "13" at 145,3730.33 h50; Top Overlay "12" at 1745,3730.33 h50; Top Overlay "1" at 1750,2440.33 h50